# Altium PCB ADS1299MFMv1.PcbDoc
Units mil, origin at the board's own origin, x right, y up, seen from the top; angles counter-clockwise.
Board outline 1496.06 x 905.51 mil, 4 copper layers (Top Layer, Internal Plane 1, Power Layer 1, Bottom Layer), stack 30.634 mil thick; 62 components, 64 nets, 287 pads, 137 vias.
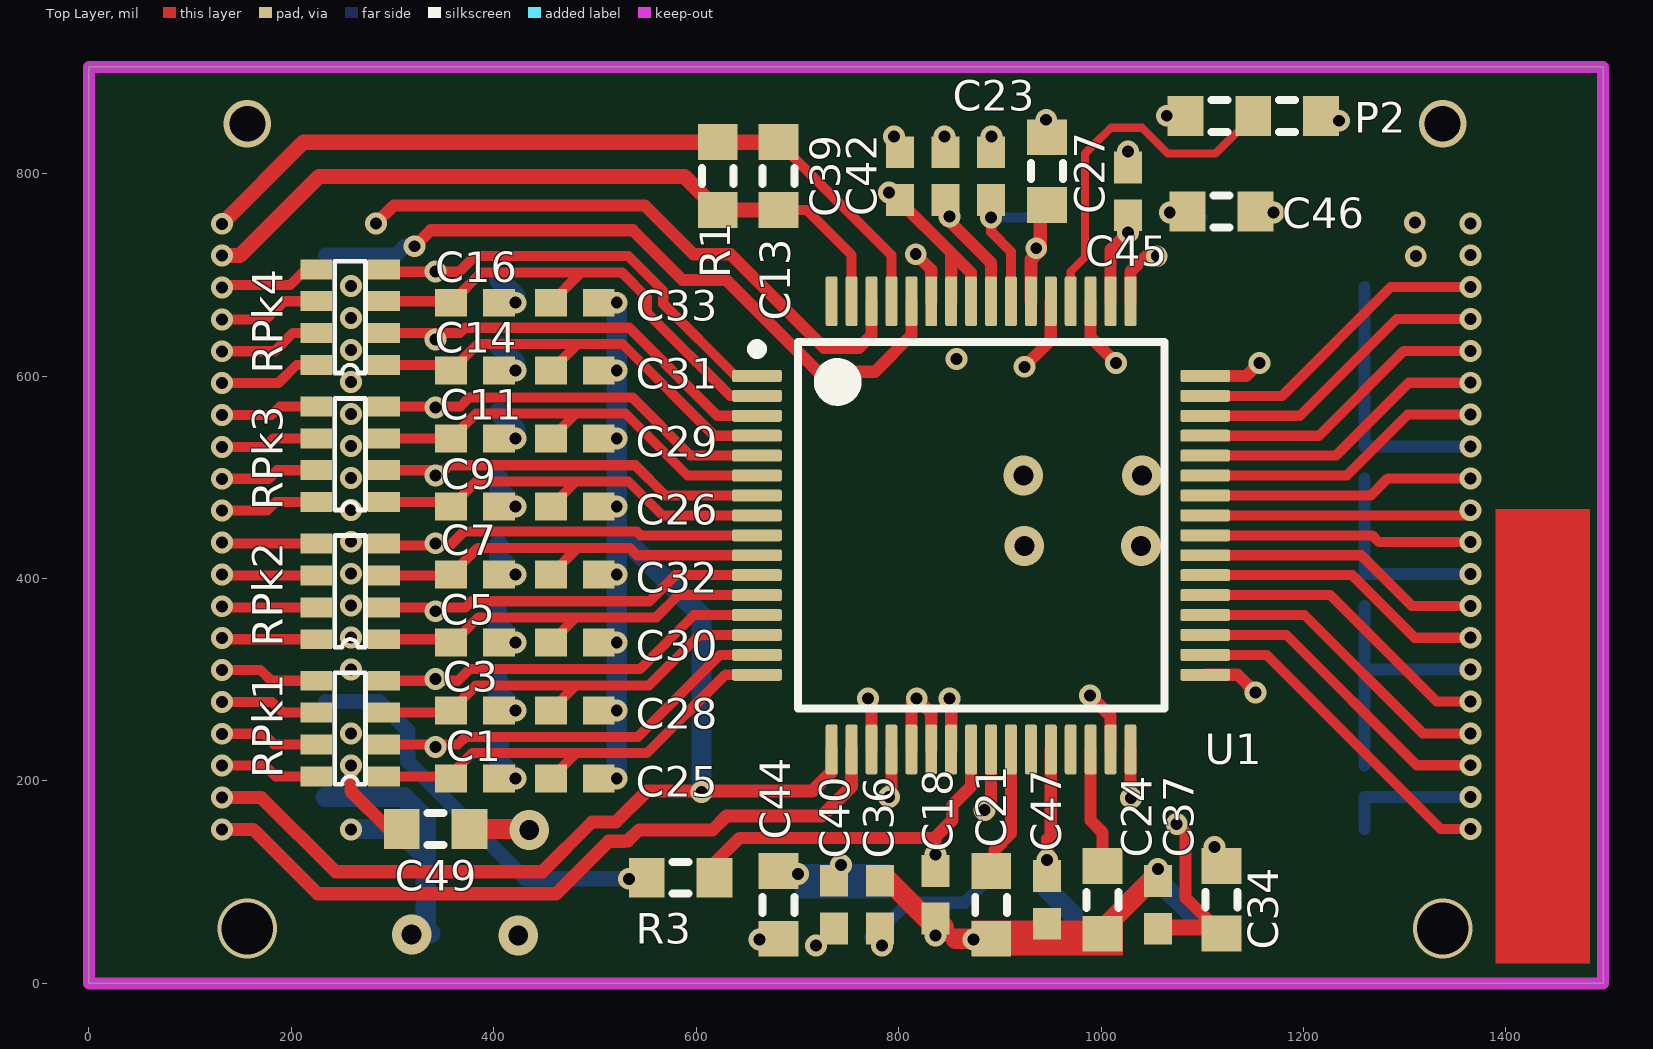
[diagram p0: Top Layer view]
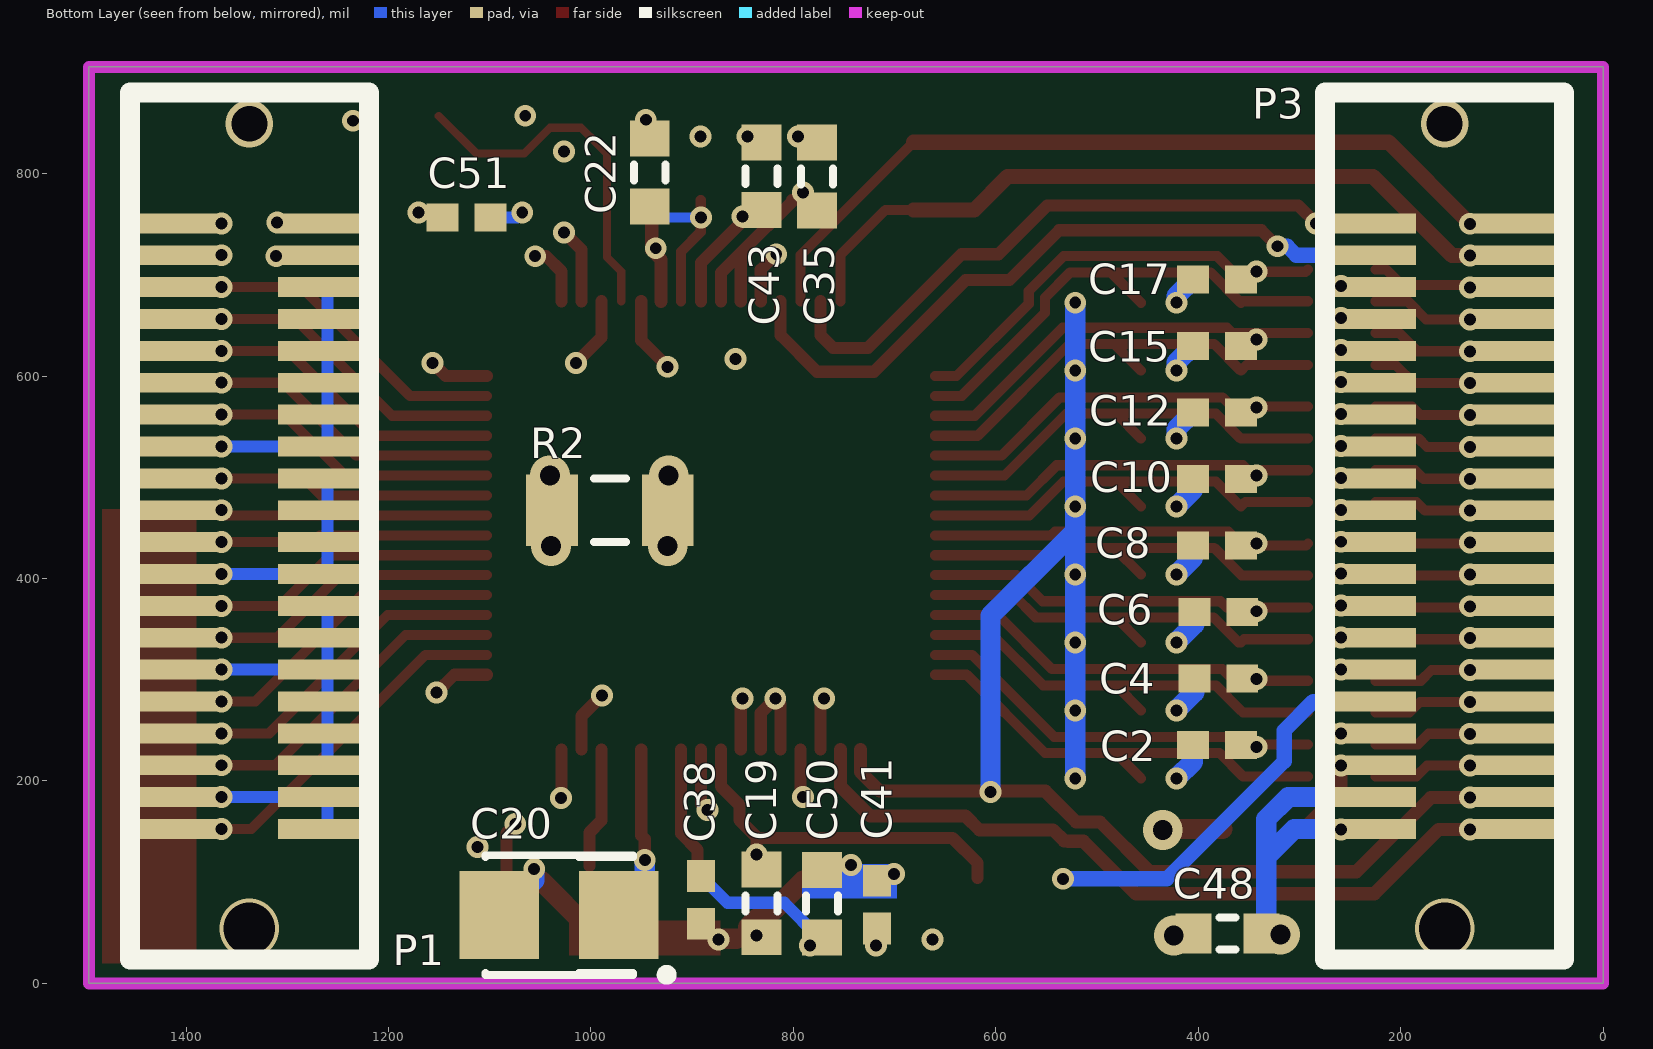
[diagram p1: Bottom Layer view, seen from below]
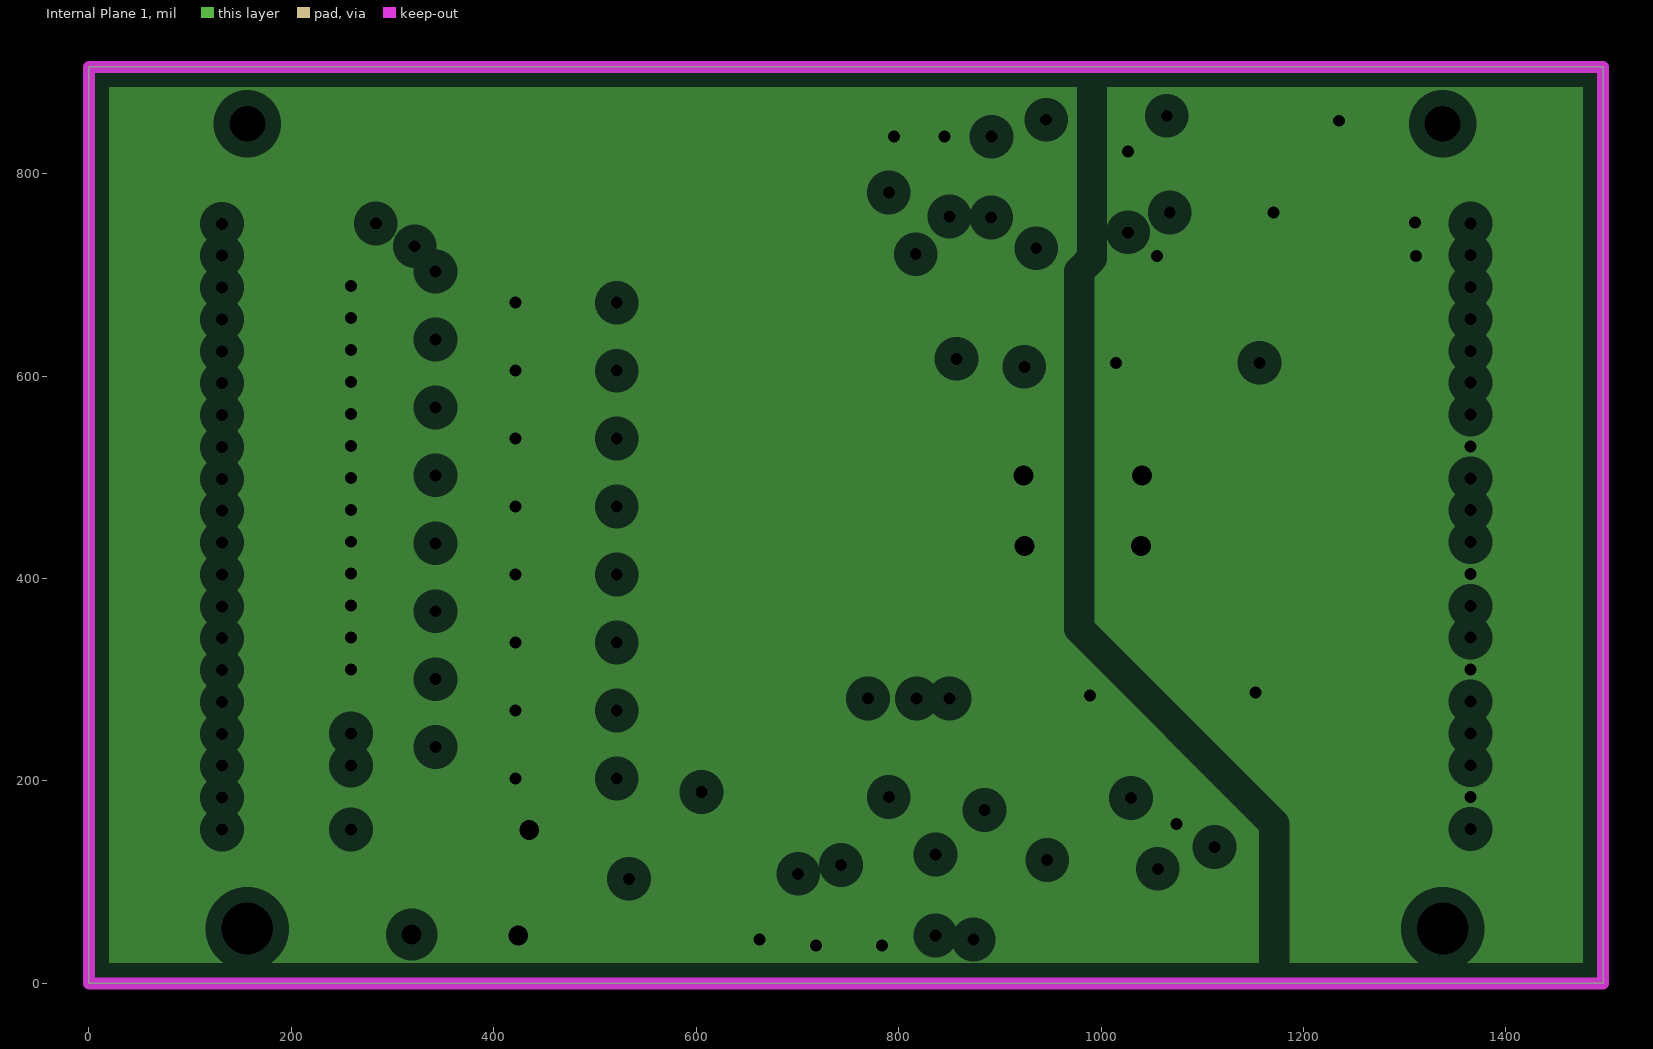
[diagram p2: Internal Plane 1, clearances drawn from the general rule]
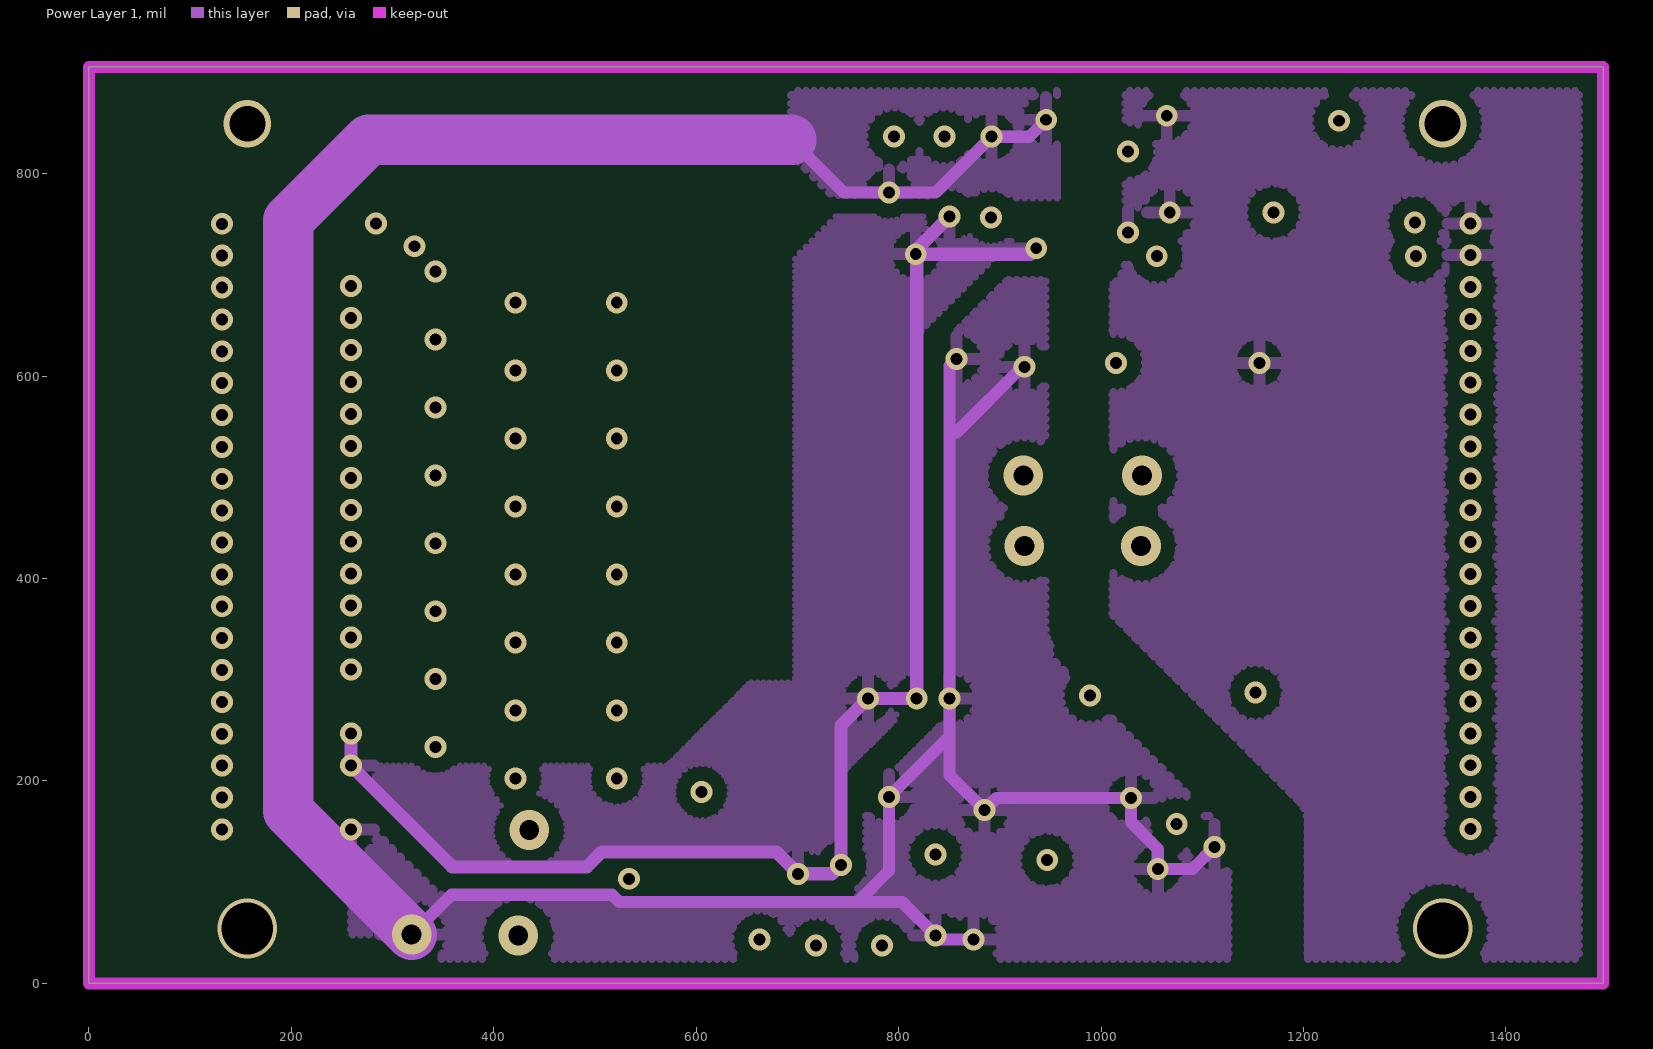
[diagram p3: Power Layer 1]

## Layer stack, top to bottom
Top Solder: solder mask 0.4, Solder Resist, Dk 3.5
Top Layer: signal copper 1.4
Dielectric1: core 10, FR-4, Dk 4.2
Internal Plane 1: plane copper 1.417
Dielectric6: prepreg 5, Dk 4.2
Power Layer 1: signal copper 1.417
Dielectric2: core 10, Dk 4.2
Bottom Layer: signal copper 1.4
Bottom Solder: solder mask 0.4, Solder Resist, Dk 3.5

## Board outline
0,0 1496.06,0 1496.06,905.51 0,905.51

## Design rules (kind name [scope] priority, off if disabled: settings)
Clearance Clearance_1 [InPolygon] p1: gap=14 ignorepadtopadclearanceinfootprint=FALSE except(0: Arc-Hole Track-Hole SMDPad-Hole THPad-Hole Via-Hole Fill-Hole Poly-Hole Region-Hole Text-Hole)
Clearance [All] p2: gap=6 ignorepadtopadclearanceinfootprint=FALSE except(0: Arc-Hole Track-Hole SMDPad-Hole THPad-Hole Via-Hole Fill-Hole Poly-Hole Region-Hole Text-Hole)
FabricationTestPointUsage TestPointUsage [All] p1: valid=0 allowmultiple=FALSE
FabricationTestpoint Testpoint [(IsPad And (OnTopLayer Or OnBottomLayer))] p1: side=3 testpointundercomponent=TRUE minsize=40 maxsize=100 preferedsize=60 minholesize=0 maxholesize=40 preferedholesize=32 testpointgrid=1 allowsidetop=TRUE allowsidebottom=TRUE usegrid=TRUE gridtolerance=0.01
HoleSize [All] p1: absolutevalues=TRUE maxlimit=787.4 minlimit=11.81 maxpercent=80.000 minpercent=20.000
HoleToHoleClearance [All] p1: gap=0 allowstackedmicrovias=TRUE
MinimumSolderMaskSliver [All] p1: minsoldermaskwidth=0
PlaneClearance [All] p1: clearance=15.75
PlaneConnect [All] p1: planeconnectstyle=Direct reliefexpansion=11.81 reliefentries=4 reliefconductorwidth=11.81 reliefairgap=11.81
PolygonConnect [All] p1: connectstyle=Relief reliefconductorwidth=11.81 reliefentries=4 polygonreliefangle="90 Angle" airgapwidth=11.81
RoutingVias [All] p1: holewidth=19.68 width=51.18 viastyle="Through Hole" minholewidth=11.81 minwidth=19.68 maxholewidth=393.7 maxwidth=787.4
SilkToSilkClearance [All] p1: silktosilkclearance=0
SilkToSolderMaskClearance SilkscreenOverComponentPads [IsPad] p1: minsilkscreentomaskgap=0 clearancetoexposedcopper=TRUE
SolderMaskExpansion [All] p1: expansion=4
Width [All] p1: maxlimit=200 minlimit=6 preferedwidth=10
21 further rules are at their usual default settings.

## Components (designator, comment, footprint, x,y, rotation, side; value= is the part's Value field where it differs from the comment)
C1 "Cap" RESC1005N 381.5,202.56 r0 top
C2 "Cap" RESC1005N 381.5,235.59 r0 bottom
C3 "Cap" RESC1005N 381.5,269.7 r0 top
C4 "Cap" RESC1005N 380.12,301.3 r0 bottom
C5 "Cap" RESC1005N 381.5,336.84 r0 top
C6 "Cap" RESC1005N 380.12,367.02 r0 bottom
C7 "Cap" RESC1005N 381.5,403.99 r0 top
C8 "Cap" RESC1005N 381.5,432.73 r0 bottom
C9 "Cap" RESC1005N 381.5,471.13 r0 top
C10 "Cap" RESC1005N 381.5,498.45 r0 bottom
C11 "Cap" RESC1005N 381.5,538.27 r0 top
C12 "Cap" RESC1005N 381.5,564.16 r0 bottom
C13 "Cap" RESC1608N 681.34,797.72 r90 top
C14 "Cap" RESC1005N 381.5,605.42 r0 top
C15 "Cap" RESC1005N 381.5,629.88 r0 bottom
C16 "Cap" RESC1005N 381.5,672.56 r0 top
C17 "Cap" RESC1005N 381.5,695.59 r0 bottom
C18 "Cap" RESC1005N 836.5,87.56 r90 top
C19 "Cap" RESC1608N 831.5,79.09 r90 bottom
C20 "Cap Tan" TC3528-1411 1031.5,67.56 r0 bottom
C21 "Cap" RESC1608N 891.5,77.56 r90 top
C22 "Cap" RESC1608N 941.93,801.18 r270 bottom
C23 "Cap" RESC1005N 891.5,797.56 r270 top
C24 "Cap" RESC1608N 1001.5,82.56 r90 top
C25 "Cap" RESC1005N 480.12,202.56 r0 top
C26 "Cap" RESC1005N 480.12,471.13 r0 top
C27 "Cap" RESC1608N 946.5,802.56 r90 top
C28 "Cap" RESC1005N 480.12,269.7 r0 top
C29 "Cap" RESC1005N 480.12,538.27 r0 top
C30 "Cap" RESC1005N 480.12,336.84 r0 top
C31 "Cap" RESC1005N 480.12,605.42 r0 top
C32 "Cap" RESC1005N 480.12,403.99 r0 top
C33 "Cap" RESC1005N 480.12,672.56 r0 top
C34 "Cap" RESC1608N 1119.09,82.68 r270 top
C35 "Cap" RESC1608N 776.57,797.24 r90 bottom
C36 "Cap" RESC1005N 781.5,77.76 r270 top
C37 "Cap" RESC1005N 1056.5,77.56 r270 top
C38 "Cap" RESC1005N 891.5,82.56 r90 bottom
C39 "Cap" RESC1005N 801.5,797.56 r90 top
C40 "Cap" RESC1005N 736.22,77.76 r90 top
C41 "Cap" RESC1005N 717.52,77.76 r90 bottom
C42 "Cap" RESC1005N 846.5,797.56 r270 top
C43 "Cap" RESC1608N 831.5,797.56 r270 bottom
C44 "Cap" RESC1608N 681.5,77.56 r90 top
C45 "Cap" RESC1005N 1026.5,782.56 r270 top
C46 "Cap" RESC1608N 1119.09,762.8 r180 top
C47 "Cap" RESC1005N 946.5,82.56 r90 top
C48 "Cap" RESC1608N 371.06,49.21 r0 bottom
C49 "Cap" RESC1608N 342.52,152.56 r180 top
C50 "Cap" RESC1608N 771.65,78.74 r90 bottom
C51 "Cap" RESC1005N 1123.03,756.89 r180 bottom
P1 "Header 20X2" FCI-B2B-0.8mm-40p 1337.6,152.56 r90 bottom locked
P2 "Res Selector" RESSEL1608N 1116.93,856.97 r0 top
P3 "Header 20X2" FCI-B2B-0.8mm-40p 156.5,152.56 r90 bottom locked
R1 "Res1" RESC1608N 621.34,797.72 r90 top
R2 "Res1" RESC3216N 981.3,467.52 r0 bottom
R3 "Res1" RESC1608N 584.65,104.33 r180 top
RPk1 "Pack Res 4x" 4X0603 291.5,204.57 r180 top
RPk2 "Pack Res 4x" 4X0603 291.5,340.07 r180 top
RPk3 "Pack Res 4x" 4X0603 291.5,475.56 r180 top
RPk4 "Pack Res 4x" 4X0603 291.5,611.06 r180 top
U1 "ADS1299IPAGR" PAG0064A_L 881.5,452.56 r0 top locked

## Footprints (in the part's own frame and the unit in brackets; to place one, negate y for a bottom-side part, rotate by r counter-clockwise, add the part's x,y. Pads: shape width x height; smd on the part's side, far side on the other; paste and mask are expansions set on the pad)
4X0603 [mm]
  rect 0.8x0.5 smd: 1(0,0) 2(0,-0.8) 3(0,-1.6) 4(0,-2.4) 5(1.7,-2.4) 6(1.7,-1.6) 7(1.7,-0.8) 8(1.7,0)
  silkscreen extent 0.47,-2.6 1.23,0.2
FCI-B2B-0.8mm-40p [mm]
  rect 0.5x2.5 smd: 1(0,-1.965) 2(0,1.965) 3(0.8,-1.965) 4(0.8,1.965) 5(1.6,-1.965) 6(1.6,1.965) 7(2.4,-1.965) 8(2.4,1.965) 9(3.2,-1.965) 10(3.2,1.965) 11(4,-1.965) 12(4,1.965) 13(4.8,-1.965) 14(4.8,1.965) 15(5.6,-1.965) 16(5.6,1.965) 17(6.4,-1.965) 18(6.4,1.965) 19(7.2,-1.965) 20(7.2,1.965) 21(8,-1.965) 22(8,1.965) 23(8.8,-1.965) 24(8.8,1.965) 25(9.6,-1.965) 26(9.6,1.965) 27(10.4,-1.965) 28(10.4,1.965) 29(11.2,-1.965) 30(11.2,1.965) 31(12,-1.965) 32(12,1.965) 33(12.8,-1.965) 34(12.8,1.965) 35(13.6,-1.965) 36(13.6,1.965) 37(14.4,-1.965) 38(14.4,1.965) 39(15.2,-1.965) 40(15.2,1.965)
  silkscreen extent -3.28,-3 18.48,3
PAG0064A_L [mm] "QFP, 64-Leads, Body 10x10mm, Pitch 0.5mm, IPC High Density"
  rrect33% 1.25x0.3 smd: 1(-5.625,3.75) 2(-5.625,3.25) 3(-5.625,2.75) 4(-5.625,2.25) 5(-5.625,1.75) 6(-5.625,1.25) 7(-5.625,0.75) 8(-5.625,0.25) 9(-5.625,-0.25) 10(-5.625,-0.75) 11(-5.625,-1.25) 12(-5.625,-1.75) 13(-5.625,-2.25) 14(-5.625,-2.75) 15(-5.625,-3.25) 16(-5.625,-3.75) 33(5.625,-3.75) 34(5.625,-3.25) 35(5.625,-2.75) 36(5.625,-2.25) 37(5.625,-1.75) 38(5.625,-1.25) 39(5.625,-0.75) 40(5.625,-0.25) 41(5.625,0.25) 42(5.625,0.75) 43(5.625,1.25) 44(5.625,1.75) 45(5.625,2.25) 46(5.625,2.75) 47(5.625,3.25) 48(5.625,3.75)
  rrect33% 0.3x1.25 smd: 17(-3.75,-5.625) 18(-3.25,-5.625) 19(-2.75,-5.625) 20(-2.25,-5.625) 21(-1.75,-5.625) 22(-1.25,-5.625) 23(-0.75,-5.625) 24(-0.25,-5.625) 25(0.25,-5.625) 26(0.75,-5.625) 27(1.25,-5.625) 28(1.75,-5.625) 29(2.25,-5.625) 30(2.75,-5.625) 31(3.25,-5.625) 32(3.75,-5.625) 49(3.75,5.625) 50(3.25,5.625) 51(2.75,5.625) 52(2.25,5.625) 53(1.75,5.625) 54(1.25,5.625) 55(0.75,5.625) 56(0.25,5.625) 57(-0.25,5.625) 58(-0.75,5.625) 59(-1.25,5.625) 60(-1.75,5.625) 61(-2.25,5.625) 62(-2.75,5.625) 63(-3.25,5.625) 64(-3.75,5.625)
  silkscreen extent -5.75,-4.6 4.6,4.6, body extent -6,-6 6,6, height 1.09
RESC1005N [mm] "Chip Resistor, Body 1.1x0.5mm, IPC Medium Density"
  rect 0.8x0.7 smd: 1(-0.6,0) 2(0.6,0)
  body extent -0.55,-0.3 0.55,0.3, height 0.4
RESC1608N [mm] "Chip Resistor, Body 1.6x0.8mm, IPC Medium Density"
  rect 0.9x1 smd: 1(-0.85,0) 2(0.85,0)
  silkscreen extent -0.2,-0.4 0.2,0.4, body extent -0.85,-0.48 0.85,0.48, height 0.6
RESC3216N [mm] "Chip Resistor, Body 3.2x1.6mm, IPC Medium Density"
  rect 1.3x1.8 smd: 1(-1.45,0) 2(1.45,0)
  silkscreen extent -0.4,-0.8 0.4,0.8, body extent -1.68,-0.87 1.68,0.87, height 0.71
RESSEL1608N [mm] "Chip Resistor, Body 1.6x0.8mm, IPC Medium Density"
  rect 0.9x1 smd: 1(-0.85,0) 2(0.85,0) 3(2.55,0)
  silkscreen extent -0.2,-0.4 1.9,0.4, body extent -0.85,-0.48 0.85,0.48, height 0.6
TC3528-1411 [mm] "Capacitor, SM Tantalum; Body 3.5 x 2.8 mm (LxW typ)"
  rect 2x2.2 smd: 1(-1.5,0) 2(1.5,0)
  silkscreen extent -2.82,-1.5 1.85,1.62

## Part data
C1 C2 C3 C4 C5 C6 C7 C8 C9 C10 C11 C12 C13 C14 C15 C16 C17 C18 C19 C21 C22 C23 C24 C25 C26 C27 C28 C29 C30 C31 C32 C33 C34 C35 C36 C37 C38 C39 C40 C41 C42 C43 C44 C45 C46 C47 C48 C49 C50 C51: "Capacitor"
C20: library part "Cap Pol3", "Polarized Capacitor (Surface Mount)"
P1 P3: "Header, 20-Pin, Dual row"
P2: library part "Header 3", "Header, 3-Pin"
R1 R2 R3: "Resistor"
RPk1 RPk2 RPk3 RPk4: library part Res_Pack_4x, "Pack Resistor 8P4R"
U1: library part CMP-0841-00001-2, "Low-Noise, 8-Channel, 24-Bit Analog Front-End for Biopotential Measurement, 16 KSPS, -40 to 85 degC, 64-Pin PQFP (PAG-64), RoHS, Tape and Reel"

## Via types
v1: diameter 21.65, hole 11.81, Top Layer to Bottom Layer, 126 vias
v2: diameter 39.37, hole 19.68, Top Layer to Bottom Layer, 7 vias
v3: diameter 59.06, hole 51.18, Top Layer to Bottom Layer, 2 vias
v4: diameter 47.24, hole 35.43, Top Layer to Bottom Layer, 2 vias

## Nets (pads, with @x,y where several pads share a name; then routed paths per layer and width w, separated by ;. In a path a pad name is that pad's centre, name@x,y a point inside that pad or via, vN(x,y) a via of type N, cw(c..) or ccw(c..) an arc to the next point about the centre after c; other vN are vias at no path point)
ADS1299_BIASIN: P3.40 U1.62 | length 594.2
  Top Layer w12: v1(283.46,750.98) 301.18,768.7 549.21,768.7 597.44,720.47 633.86,720.47 726.38,627.95 760.83,627.95 773.23,640.35 U1.62
ADS1299_BIASINV: C13.2 P3.39 R1.2 U1.61 | length 786.6
  Top Layer w10: C13.2 792.91,719.61 U1.61
  Top Layer w15: v1(131.5,750.55) 212.13,831.18 R1.2 C13.2
ADS1299_BIASOUT: C13.1 P3.37 R1.1 U1.63 | length 732.3
  Top Layer w10: C13.1 709.17,764.25 753.54,719.88 U1.63
  Top Layer w15: v1(131.5,719.06) 149.17,719.06 227.36,797.24 588.35,797.24 R1.1 C13.1
ADS1299_BIASREF: P3.38 U1.60 | length 695.4
  Top Layer w12: v1(321.85,728.35) 337.6,744.09 537.4,744.09 586.61,694.88 629.92,694.88 720.47,604.33 776.57,604.33 812.6,640.35 U1.60
  Bottom Layer w15: P3.38 303.15,719.49 312.01,728.35 v1(321.85,728.35)
ADS1299_CLK: P1.10 U1.37 | length 305.7
  Top Layer w10: U1.37 1226.57,383.66 1331.69,278.54 v1(1365.16,278.54)
ADS1299_CLKSEL: P2.2 U1.52 | length 354.4
  Top Layer w8: U1.52 970.08,703.35 984.25,717.52 984.25,819.88 993.11,828.74 1009.84,845.47 1040.35,845.47 1065.94,819.88 1113.31,819.88 P2.2
ADS1299_DSYIN: P1.22 U1.41 | length 264.3
  Top Layer w10: U1.41 1360.04,462.4 v1(1365.16,467.52)
ADS1299_GPIO1: P1.24 U1.42 | length 269.2
  Top Layer w10: U1.42 1266.54,482.09 1283.46,499.02 v1(1365.16,499.02)
ADS1299_GPIO2: P1.30 U1.44 | length 292
  Top Layer w10: U1.44 1232.09,521.46 1304.13,593.5 v1(1365.16,593.5)
ADS1299_GPIO3: P1.32 U1.45 | length 296.9
  Top Layer w10: U1.45 1215.35,541.14 1299.21,625 v1(1365.16,625)
ADS1299_GPIO4: P1.34 U1.46 | length 301.8
  Top Layer w10: U1.46 1196.65,560.83 1292.32,656.5 v1(1365.16,656.5)
ADS1299_IN1N: C2.1 RPk1.2 U1.15 | length 405.2
  Top Layer w10: RPk1.2 364.73,236.06 372.23,243.56 542.5,243.56 623.54,324.61 U1.15
  other v1: 342.32,233.43
ADS1299_IN1P: C1.1 C25.1 RPk1.1 U1.16 | length 445.5
  Top Layer w10: RPk1.1 355.87,204.57 378.86,227.56 481.5,227.56 ; C25.1 481.5,227.56 ; U1.16 628.86,304.92 551.5,227.56 481.5,227.56
ADS1299_IN2N: C4.1 RPk1.4 U1.13 | length 395.4
  Top Layer w10: RPk1.4 364.6,299.06 376.03,310.48 544.42,310.48 597.91,363.98 U1.13
  other v1: 342.32,300.57
ADS1299_IN2P: C3.1 C28.1 RPk1.3 U1.14 | length 435.4
  Top Layer w10: RPk1.3 355.73,267.56 C3.1 382.65,294.48 481.28,294.48 ; C28.1 481.28,294.48 ; U1.14 603.23,344.29 553.42,294.48 481.28,294.48
ADS1299_IN3N: C6.1 RPk2.2 U1.11 | length 381.7
  Top Layer w10: RPk2.2 372.12,371.56 378.19,377.62 553.93,377.62 579.66,403.35 U1.11
  other v1: 342.32,367.71
ADS1299_IN3P: C5.1 C30.1 RPk2.1 U1.12 | length 424.3
  Top Layer w10: RPk2.1 354.65,340.07 C5.1 360.03,336.84 384.81,361.62 481.28,361.62 ; C30.1 481.28,361.62 ; U1.12 582.6,383.66 560.56,361.62 481.28,361.62
ADS1299_IN4N: C8.1 RPk2.4 U1.9 | length 376.6
  Top Layer w10: RPk2.4 293.49,432.56 356.5,432.56 370.29,446.35 436.19,446.35 541.5,446.35 545.13,442.72 U1.9
  other v1: 342.32,434.85
ADS1299_IN4P: C7.1 C32.1 RPk2.3 U1.10 | length 420.2
  Top Layer w10: RPk2.3 356.94,403.06 C7.1 384.24,430.35 429.56,430.35 482.86,430.35 ; C32.1 482.86,430.35 ; U1.10 541.5,423.03 534.18,430.35 482.86,430.35
ADS1299_IN5N: C10.1 RPk3.2 U1.7 | length 382.9
  Top Layer w10: RPk3.2 351,507.06 355.85,511.91 539.77,511.91 569.6,482.09 U1.7
  other v1: 342.32,502
ADS1299_IN5P: C9.1 C26.1 RPk3.1 U1.8 | length 429.6
  Top Layer w10: RPk3.1 353.44,475.56 C9.1 382.65,495.91 481.28,495.91 ; C26.1 481.28,495.91 ; U1.8 566.65,462.4 533.15,495.91 481.28,495.91
ADS1299_IN6N: C12.1 RPk3.4 U1.5 | length 396.1
  Top Layer w10: RPk3.4 367.03,570.05 376.03,579.05 536.84,579.05 594.44,521.46 U1.5
  other v1: 342.32,569.14
ADS1299_IN6P: C11.1 C29.1 RPk3.3 U1.6 | length 439.4
  Top Layer w10: RPk3.3 357.59,538.56 C11.1 382.65,563.05 481.28,563.05 ; C29.1 481.28,563.05 ; U1.6 591.5,501.77 530.22,563.05 481.28,563.05
ADS1299_IN7N: C15.1 RPk4.2 U1.3 | length 406.7
  Top Layer w10: RPk4.2 366.5,642.56 371.72,647.78 533.9,647.78 620.86,560.83 U1.3
  other v1: 342.32,636.28
ADS1299_IN7P: C14.1 C31.1 RPk4.1 U1.4 | length 456.6
  Top Layer w10: RPk4.1 352.23,611.06 C14.1 384.24,631.78 482.86,631.78 ; C31.1 482.86,631.78 ; U1.4 617.91,541.14 527.28,631.78 482.86,631.78
ADS1299_IN8N: C17.1 RPk4.4 U1.1 | length 432.3
  Top Layer w10: RPk4.4 293.86,703.18 365.87,703.18 381.25,718.56 533.12,718.56 567.5,684.19 567.5,671.56 638.86,600.2 U1.1
  other v1: 342.32,703.43
ADS1299_IN8P: C16.1 C33.1 RPk4.3 U1.2 | length 483.4
  Top Layer w10: RPk4.3 356.38,674.05 C16.1 387.87,702.56 486.5,702.56 ; C33.1 486.5,702.56 ; U1.2 633.54,580.51 551.5,662.56 551.5,677.56 526.5,702.56 486.5,702.56
ADS1299_MISO: P1.28 U1.43 | length 287.2
  Top Layer w10: U1.43 1242.91,501.77 1303.15,562.01 v1(1365.16,562.01)
ADS1299_MOSI: P1.2 U1.34 | length 333.5
  Top Layer w10: U1.34 1163.58,324.61 1335.63,152.56 v1(1365.16,152.56)
ADS1299_NCS: P1.16 U1.39 | length 282.9
  Top Layer w10: U1.39 1257.09,423.03 1307.09,373.03 v1(1365.16,373.03)
ADS1299_NDRDY: P1.36 U1.47 | length 306.7
  Top Layer w10: U1.47 1178.94,580.51 1286.42,687.99 v1(1365.16,687.99)
ADS1299_NPWDN: P1.6 U1.35 | length 315.5
  Top Layer w10: U1.35 1183.27,344.29 1312.01,215.55 v1(1365.16,215.55)
ADS1299_NRESET: P1.8 U1.36 | length 310.6
  Top Layer w10: U1.36 1200.98,363.98 1317.91,247.05 v1(1365.16,247.05)
ADS1299_SCLK: P1.20 U1.40 | length 265
  Top Layer w10: U1.40 1267.91,442.72 1274.61,436.02 v1(1365.16,436.02)
ADS1299_SRB1: C25.2 C26.2 C28.2 C29.2 C30.2 C31.2 C32.2 C33.2 P3.3 U1.17 | length 1458.4
  Top Layer w13: v1(131.5,183.62) 170.43,183.62 243.82,110.24 447.83,110.24 497.05,159.45 520.67,159.45 551.18,189.96 714.69,189.96 733.86,209.13 U1.17
  Bottom Layer w20: v1(521.5,202.56) v1(521.5,269.7) v1(521.5,336.84) v1(521.5,403.99) v1(521.5,471.13) v1(521.5,538.27) v1(521.5,605.42) v1(521.5,672.56) ; 521.5,447.01 605.32,363.19 v1(605.32,188.98)
ADS1299_SRB2: P3.1 U1.18 | length 728.8
  Top Layer w13: v1(131.5,152.13) 162.4,152.13 225.94,88.58 461.61,88.58 513.48,140.45 528.54,140.45 528.84,140.75 532.52,140.75 543.35,151.57 616.14,151.57 629.92,165.35 724.29,165.35 753.54,194.61 U1.18
ADS1299_START: P1.14 U1.38 | length 287.8
  Top Layer w10: U1.38 1248.23,403.35 1310.04,341.54 v1(1365.16,341.54)
ADS1299_VREFP: C18.2 C19.2 R3.1 U1.24 | length 377.8
  Top Layer w12: R3.1 618.11,119.09 642.72,143.7 836.5,143.7 ; C18.2 836.5,143.7 ; U1.24 871.65,194.49 853.35,176.18 853.35,161.42 836.5,144.57 836.5,143.7
  other v1: 836.5,127.44
AGND: C1.2 C2.2 C3.2 C4.2 C5.2 C6.2 C7.2 C8.2 C9.2 C10.2 C11.2 C12.2 C14.2 C15.2 C16.2 C17.2 C34.2 C35.2 C36.2 C37.2 C38.2 C39.2 C40.1 C41.1 C42.1 C43.1 C44.1 C48.2 C49.1 C50.1 P3.12 P3.14 P3.16 P3.18 P3.20 P3.22 P3.24 P3.26 P3.28 P3.30 P3.32 P3.34 P3.36 R2.1 U1.31 | length 672.6
  Top Layer w12: v1(989.17,284.45) 1009.45,264.17 U1.31 ; v1(1074.8,157.48) 1083.66,148.62 1083.66,84.65 C34.2
  Top Layer w20: C49.1 434.06,152.56 v2(435.04,151.57)
  Bottom Layer w12: C50.1 774.61,45.28 809.06,79.72 865.04,79.72 C38.2
  Bottom Layer w20: C4.2 403.74,287.46 v1(421.5,269.7) ; C6.2 403.74,354.6 v1(421.5,336.84) ; C2.2 405.12,218.94 v1(421.5,202.56) ; C8.2 405.12,420.37 v1(421.5,403.99) ; C10.2 405.12,487.51 v1(421.5,471.13) ; C12.2 421.5,547.78 v1(421.5,538.27) ; C15.2 421.5,613.5 v1(421.5,605.42) ; C17.2 421.5,679.21 v1(421.5,672.56)
  other v1: 718.5,37.4 783.46,37.4 662.4,43.31 258.86,310.04 258.86,341.62 258.86,373.2 258.86,404.77 258.86,436.35 258.86,467.93 258.86,499.51 258.86,531.09 258.86,562.66 258.86,594.24 258.86,625.82 258.86,657.4 258.86,688.98 795.28,836.61 845.47,836.61
  other v2: 424.21,47.24 924.21,432.09 923.23,501.97
AVDD: C27.1 C40.2 C41.2 C42.2 C43.2 C44.2 C49.2 C50.2 P3.6 P3.8 U1.19 U1.21 U1.22 U1.54 U1.56 U1.59 | length 1918.9
  Top Layer w12: v1(769.69,281.5) 773.23,277.95 U1.19 ; U1.21 812.6,276.18 v1(817.91,281.5) 832.28,267.13 U1.22 ; v1(816.93,720.47) 832.28,705.12 U1.59 ; v1(850.39,757.87) 850.39,752.95 891.34,712.01 U1.56
  Top Layer w13: v1(258.86,215.31) 258.86,189.96 296.26,152.56 C49.2 ; U1.54 930.71,715.16 939.96,724.41 939.96,762.56 C27.1
  Power Layer 1 w13: v1(258.86,246.88) v1(258.86,215.31) 359.01,115.16 492.13,115.16 506.89,129.92 679.13,129.92 v1(700.79,108.27) 734.25,108.27 v1(743.11,117.13) 743.11,254.92 v1(769.69,281.5) v1(817.91,281.5) 817.91,719.49 v1(816.93,720.47) ; v1(850.39,757.87) 816.93,724.41 v1(816.93,720.47) ; v1(936.02,726.38) 930.12,720.47 v1(816.93,720.47)
AVSS: C18.1 C19.1 C20.2 C21.1 C22.1 C23.1 C24.1 C27.2 C34.1 C35.1 C36.1 C37.1 C38.1 C39.1 C47.1 C48.1 P3.2 P3.4 U1.20 U1.23 U1.25 U1.32 U1.53 U1.57 U1.58 | length 4239.7
  Top Layer w12: v1(790.35,184.06) 792.91,186.61 U1.20 ; C39.1 801.5,772.32 851.97,721.85 ; U1.23 v1@851.97,279.92 ; U1.58 851.97,721.85 ; U1.57 871.65,702.17 851.97,721.85 ; v1(884.84,171.26) 891.34,177.76 U1.25 ; v1(924.21,609.25) 950.39,635.43 U1.53 ; v1@1029.13,183.46 U1.32
  Top Layer w20: C36.1 790.35,101.38 827.8,63.94 C18.1 C18.1@844.9,55.53 ; 856.34,44.09 C21.1@874.02,44.09 ; C24.1 1001.5,53.66 1049.02,101.18 C37.1
  Power Layer 1 w12: v2(318.9,48.23) 358.27,87.6 516.93,87.6 524.01,80.52 759.65,80.52 ; 693.61,833.66 745.77,781.5 v1(790.35,781.5) 836.61,781.5 v1(891.73,836.61) 929.13,836.61 v1(945.87,853.35) ; 857.28,544.29 v1@923.23,610.24 ; v1(857.28,617.13) 850.39,610.24 v1(850.39,281.5) 850.39,244.09 ; v1(874.02,43.31) 840.55,43.31 v1(836.61,47.24) 803.34,80.52 759.65,80.52 ; v1(1112.2,134.84) 1090.55,113.19 v1(1056.1,113.19) 1056.1,132.87 1029.53,159.45 v1(1029.53,183.07) 896.65,183.07 v1(884.84,171.26) 850.39,205.71 850.39,244.09 ; 759.65,80.52 790.35,111.22 v1(790.35,184.06) 850.39,244.09
  Power Layer 1 w50: v2(318.9,48.23) 196.85,170.28 196.85,753.94 276.57,833.66 693.61,833.66 693.9,833.66
  Bottom Layer w20: P3.4 311.02,184.06 332.68,162.4 332.68,125 ; P3.2@258.86,152.56 305.12,152.56 332.68,125 ; C48.1 332.68,54.13 332.68,125 ; v1(1056.1,113.19) 1056.1,102.01 C20.2
  other v1: 258.86,152.15
DGND: C45.1 C46.1 C51.1 P1.1 P1.3 P1.4 P1.5 P1.7 P1.9 P1.11 P1.12 P1.13 P1.15 P1.17 P1.18 P1.19 P1.21 P1.23 P1.25 P1.26 P1.27 P1.29 P1.31 P1.33 P1.35 P1.37 P1.39 P2.3 R2.2 U1.33 U1.49 U1.51 | length 1050.3
  Top Layer w12: U1.51 989.76,638.19 v1(1014.76,613.19) ; U1.49 1029.13,703.35 1044.29,718.5 v1(1055.12,718.5) ; U1.33 1135.04,304.92 v1(1152.56,287.4)
  Bottom Layer w12: P1.1 P1.3 v1(1365.16,184.06) ; P1.5 P1.7 P1.9 P1.11 ; P1.15 P1.13 P1.11 ; P1.23 P1.21 P1.19 P1.17 v1(1365.16,404.53) ; P1.35 P1.33 P1.31 P1.29 P1.27 P1.25 v1(1365.16,530.51) ; v1(1365.16,310.04) P1.11
  other v1: 1311.02,718.5 1310.04,751.97 1170.28,761.81 1026.57,821.85 1235.24,852.36
  other v2: 1039.37,432.09 1040.35,501.97
DVDD: C45.2 C46.2 C51.2 P1.38 P1.40 P2.1 U1.48 U1.50 | length 167.7
  Top Layer w12: U1.50 1009.45,725 v1(1026.57,742.13) ; U1.48 1143.5,600.2 v1(1156.5,613.19)
  Bottom Layer w12: v1(1067.91,761.81) 1072.83,756.89 C51.2
  other v1: 1365.16,719.49 1365.16,750.98 1064.96,857.28
MOD_IN1N: P3.7 RPk1.7 | length 97.4
  Top Layer w10: v1(131.5,246.61) 172.44,246.61 182.99,236.06 RPk1.7
MOD_IN1P: P3.5 RPk1.8 | length 97.4
  Top Layer w10: v1(131.5,215.12) 173.94,215.12 184.49,204.57 RPk1.8
MOD_IN2N: P3.11 RPk1.5 | length 97.4
  Top Layer w10: v1(131.5,309.61) 169.45,309.61 180,299.06 RPk1.5
MOD_IN2P: P3.9 RPk1.6 | length 97.4
  Top Layer w10: v1(131.5,278.11) 180.94,278.11 191.5,267.56 RPk1.6
MOD_IN3N: P3.15 RPk2.7 | length 93.5
  Top Layer w10: v1(131.5,372.6) 132.53,371.56 RPk2.7
MOD_IN3P: P3.13 RPk2.8 | length 93.5
  Top Layer w10: v1(131.5,341.1) 132.53,340.07 RPk2.8
MOD_IN4N: P3.19 RPk2.5 | length 93.5
  Top Layer w10: v1(131.5,435.59) 132.53,434.55 RPk2.5
MOD_IN4P: P3.17 RPk2.6 | length 93.5
  Top Layer w10: v1(131.5,404.09) 132.53,403.06 RPk2.6
MOD_IN5N: P3.23 RPk3.7 | length 96.6
  Top Layer w10: v1(131.5,498.58) 177.52,498.58 186,507.06 RPk3.7
MOD_IN5P: P3.21 RPk3.8 | length 96.6
  Top Layer w10: v1(131.5,467.09) 176.02,467.09 184.5,475.56 RPk3.8
MOD_IN6N: P3.27 RPk3.5 | length 96.6
  Top Layer w10: v1(131.5,561.57) 180.51,561.57 188.99,570.05 RPk3.5
MOD_IN6P: P3.25 RPk3.6 | length 96.6
  Top Layer w10: v1(131.5,530.08) 174.02,530.08 182.49,538.56 RPk3.6
MOD_IN7N: P3.31 RPk4.7 | length 100.5
  Top Layer w10: v1(131.5,624.57) 183.5,624.57 201.5,642.56 RPk4.7
MOD_IN7P: P3.29 RPk4.8 | length 100.5
  Top Layer w10: v1(131.5,593.07) 187.01,593.07 205,611.06 RPk4.8
MOD_IN8N: P3.35 RPk4.5 | length 100.5
  Top Layer w10: v1(131.5,687.56) 133.99,690.05 198.91,690.05 214.41,705.55 RPk4.5
MOD_IN8P: P3.33 RPk4.6 | length 100.5
  Top Layer w10: v1(131.5,656.06) 175,656.06 192.99,674.05 RPk4.6
MOD_VREFP: P3.10 R3.2 | length 390
  Bottom Layer w15: P3.10 286.42,278.54 314.96,250 314.96,219.49 431.1,103.35 v1(533.46,103.35)
NetC20_1: C20.1 C47.2 U1.28 | length 191.6
  Top Layer w12: C47.2 946.85,106.54 v1(946.85,122.05) 946.85,142.72 950.39,146.26 U1.28
  Bottom Layer w20: v1(946.85,122.05) 946.85,93.15 C20.1
NetC21_2: C21.2 U1.26 | length 128.2
  Top Layer w12: C21.2 894.69,114.21 894.69,131.89 911.02,148.23 U1.26
NetC22_2: C22.2 C23.2 U1.55 | length 161.3
  Top Layer w10: C23.2 v1(891.5,756.89) 891.5,742.56 911.02,723.03 U1.55
  Bottom Layer w10: v1(891.5,756.89) 935.04,756.89 C22.2@941.93,763.78
NetC24_2: C24.2 U1.30 | length 119.9
  Top Layer w12: U1.30 989.76,160.83 1001.5,149.09 C24.2
pads on no net: U1.27 U1.29 U1.64
copper on no net:
  other v3: 156.5,54.13 1337.6,54.13
  other v4: 156.5,849.41 1337.6,849.41

## Polygon pours and split planes (outlines as drawn)
DVDD on Power Layer 1 "Power Layer 1-DVDD" (hatched 90Degree grid 8 track 8, pour order 2): 991.14,905.51 1496.06,905.51 1496.06,0 1171.26,0 1171.26,157.48 978.35,350.39 978.35,703.74 990.16,715.55 990.16,904.53 991.14,905.51
AVDD on Power Layer 1 "Power Layer 1-AVDD" (hatched 90Degree grid 6 track 6, remove dead copper, pour order 4): 258.86,246.88 258.86,215.31 359.01,115.16 492.13,115.16 506.89,129.92 679.13,129.92 700.79,108.27 734.25,108.27 743.11,117.13 743.11,206.69 817.91,281.5 817.91,639.76 898.62,720.47 930.12,720.47 936.02,726.38 904.53,757.87 850.39,757.87 738.19,757.87 706.69,726.38 697.83,717.52 697.83,297.24 653.54,297.24 578.74,222.44 571.6,215.31 258.86,215.31
AVSS on Power Layer 1 "Power Layer 1-AVDD" (hatched 90Degree grid 8 track 8, remove dead copper, pour order 6): 258.86,152.15 258.86,47.24 259.84,48.23 318.9,48.23 367.13,0 1125.98,0 1125.98,146.65 1037.4,235.24 949.8,322.83 949.8,694.88 907.48,694.88 858.27,645.67 850.39,637.8 850.39,610.24 850.39,263.78 847.44,260.83 759.65,173.04 759.65,80.52 524.01,80.52 516.93,87.6 358.27,87.6 345.47,87.6 285.43,147.64 280.92,152.15 258.86,152.15
AVSS on Power Layer 1 "Power Layer 1-AVDD" (hatched 90Degree grid 8 track 8, remove dead copper, pour order 8): 956.69,906.5 956.69,776.57 736.22,776.57 691.93,820.87 693.9,822.83 693.9,905.51
AGND on Internal Plane 1 (split plane): 976.07,722.78 967.69,714.4 965.81,712.11 964.42,709.51 963.56,706.68 963.27,703.74 963.27,350.39 963.56,347.45 964.42,344.63 965.81,342.02 967.69,339.74 1156.19,151.24 1156.19,20.1 20.1,20.1 20.1,885.41 976.07,885.41
DGND on Internal Plane 1 (split plane): 1475.97,20.1 1186.33,20.1 1186.33,157.48 1186.04,160.42 1185.19,163.25 1183.79,165.85 1181.92,168.14 993.42,356.64 993.42,697.5 1001.8,705.88 1003.67,708.16 1005.07,710.77 1005.92,713.59 1006.21,716.54 1006.21,885.41 1475.97,885.41

## Keep-outs
Keep-Out Layer:
  the board outline again, w11.81

## Other copper
Top Layer:
  rectangle: 1389.76,19.68 1483.27,468.5
  rectangle net AVSS: 872.05,27.56 1021.65,62.01
  rectangle net AGND: 1065.94,47.24 1106.3,62.99
Bottom Layer:
  rectangle net AVDD: 697.83,83.66 791.34,118.11
Internal Plane 1 (plane layer: these items are gaps in the copper):
  lines w30: 991.14,905.51 991.14,716.54 978.35,703.74 978.35,350.39 1171.26,157.48 1171.26,0

## Silkscreen, mask and mechanical layers (free items; w line width, h text height)
Top Solder:
  text "Liu Miao 2019.6" at 1476.38,29.53 h30 r90
  text "ADS1299MFMv1" at 1432.09,27.56 h30 r90

## Dimensions
1496.06,0 to 1496.06,905.51 on Mechanical 1
0,0 to 1496.06,0 on Mechanical 1